# Altium PCB Eurocard VME 6U with break-away tab (9.187 x 8.660 inches).PCBDOC
Units mil, origin at the board's own origin, x right, y up, seen from the top; angles counter-clockwise.
Board outline 9937 x 8660 mil, 10 copper layers (TopLayer, MidLayer1, MidLayer2, MidLayer3, MidLayer4, MidLayer5, MidLayer6, MidLayer7, MidLayer8, BottomLayer); 2 components, 0 nets, 216 pads, 0 vias.
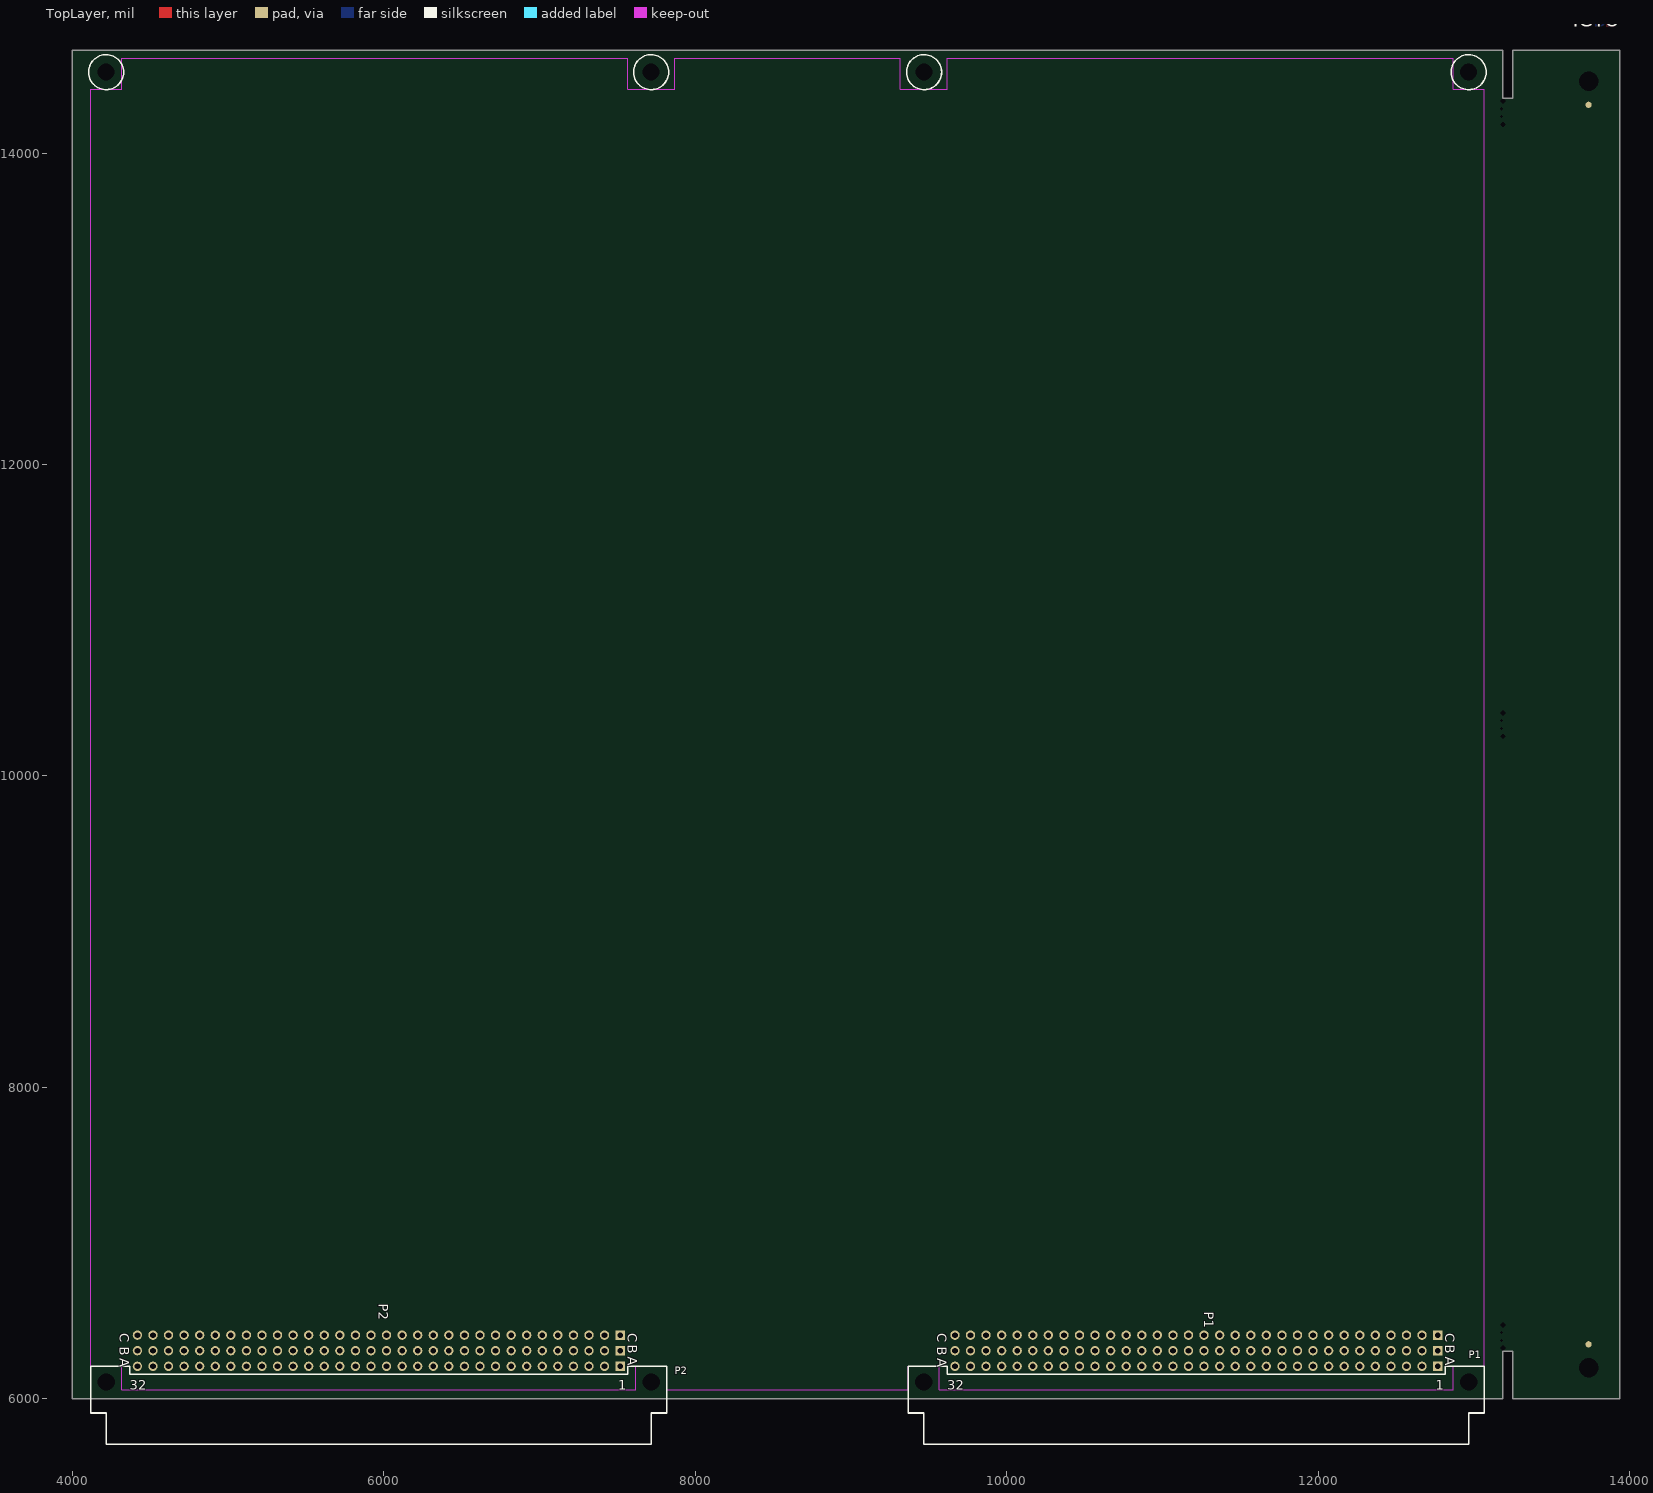
[diagram p0: TopLayer view]
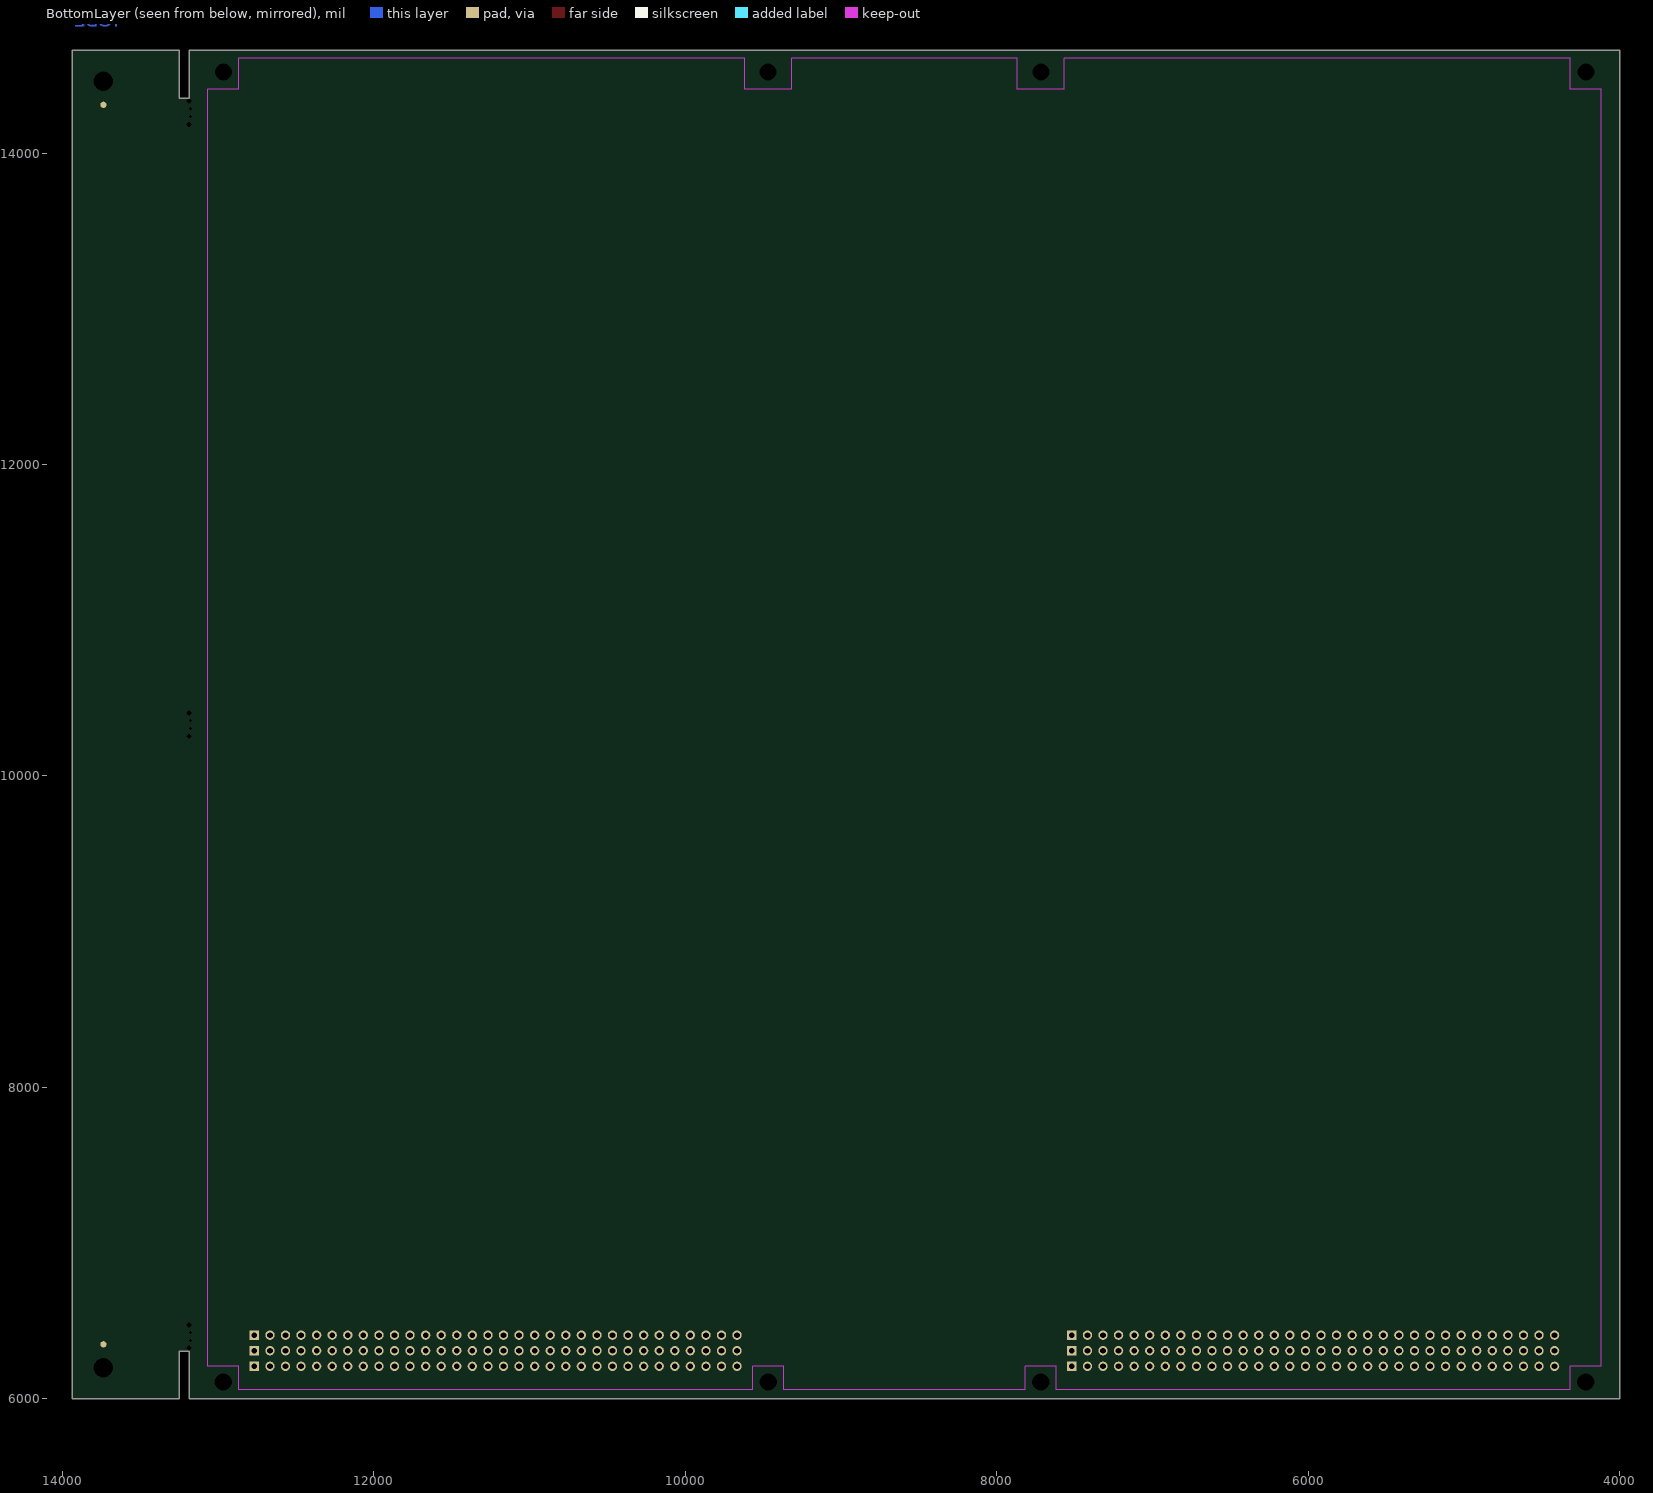
[diagram p1: BottomLayer view, seen from below]
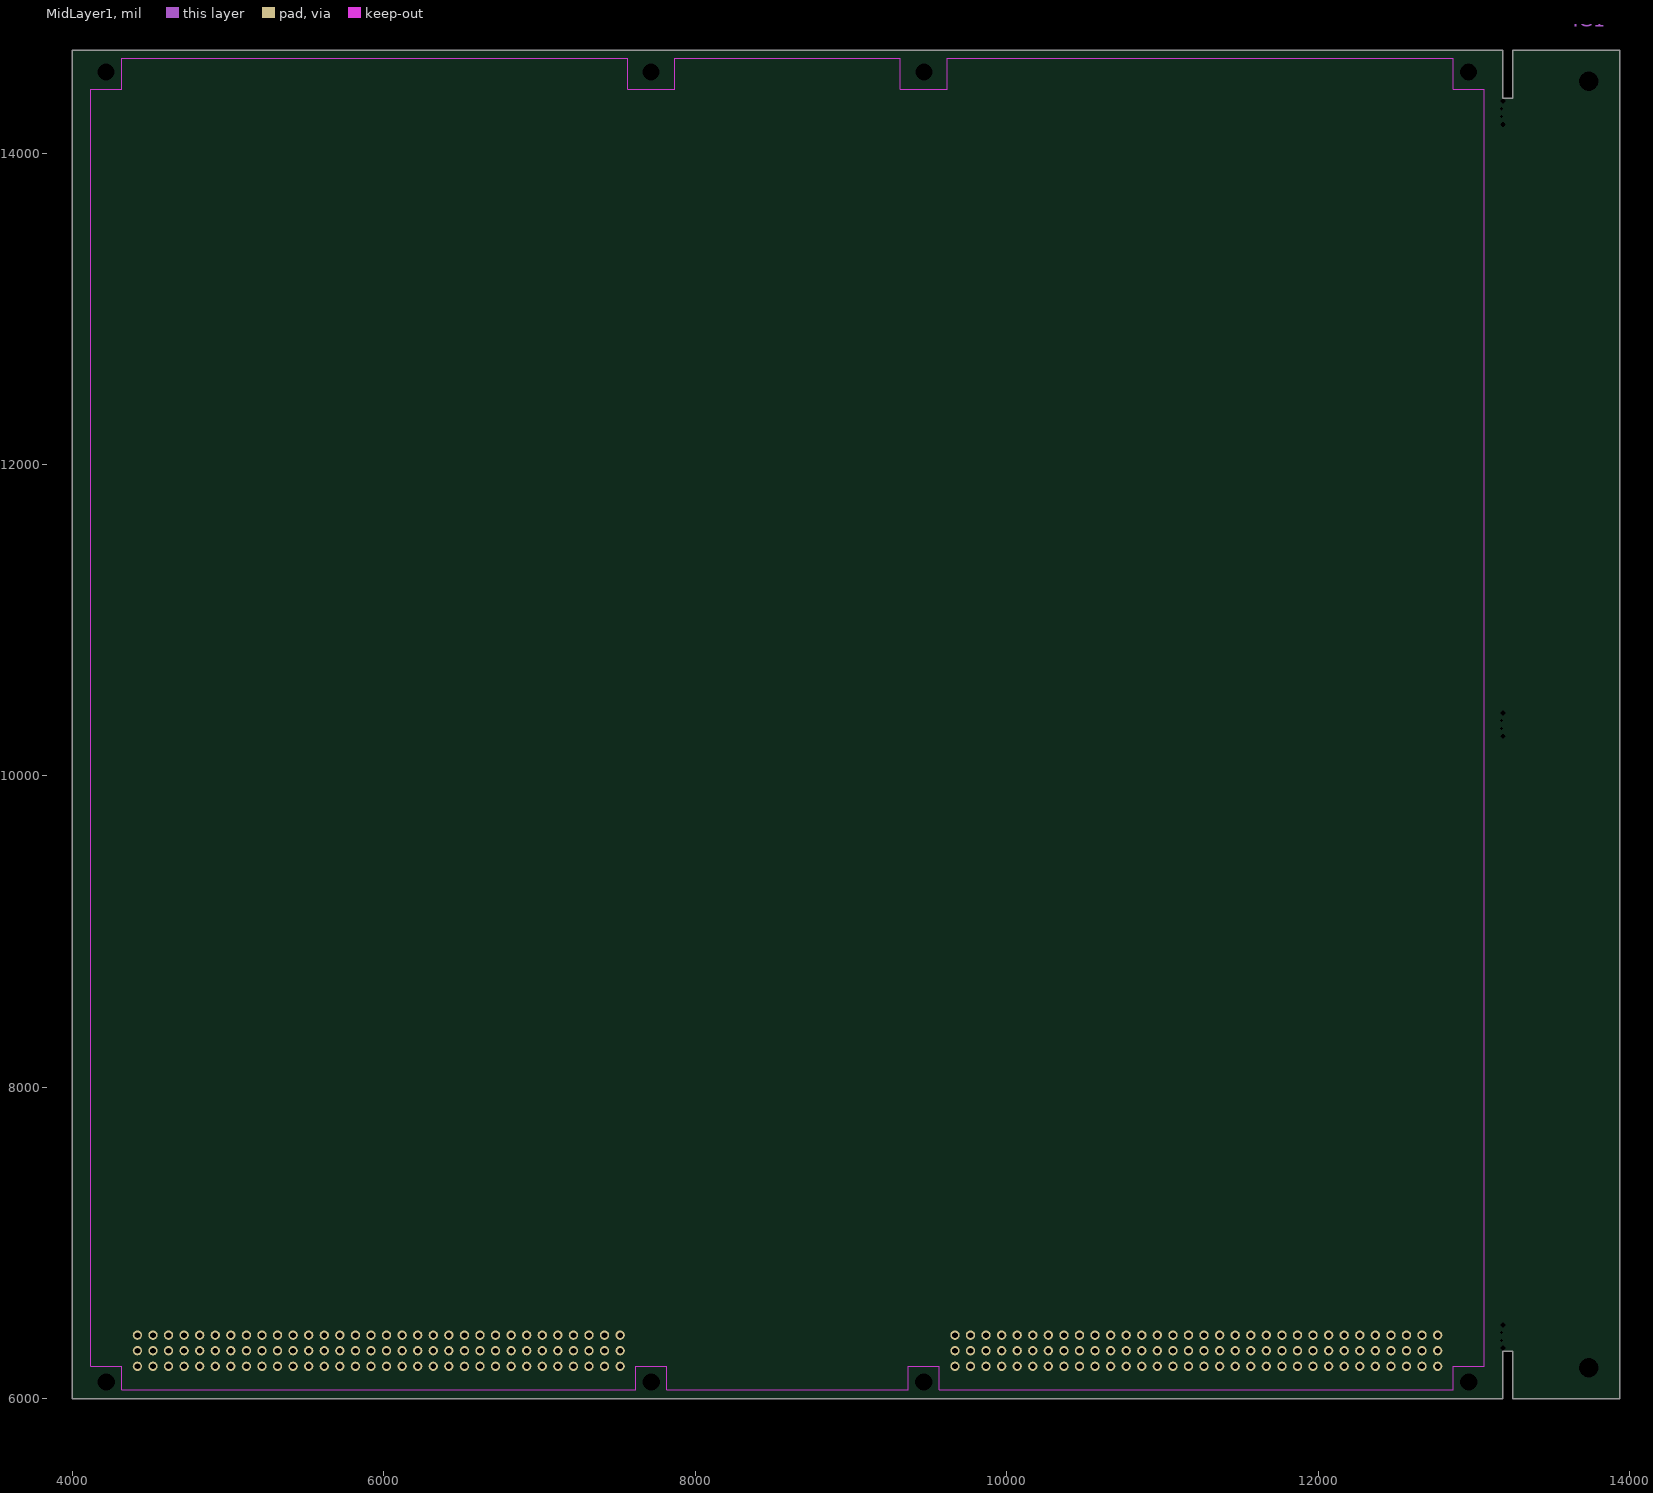
[diagram p2: MidLayer1]
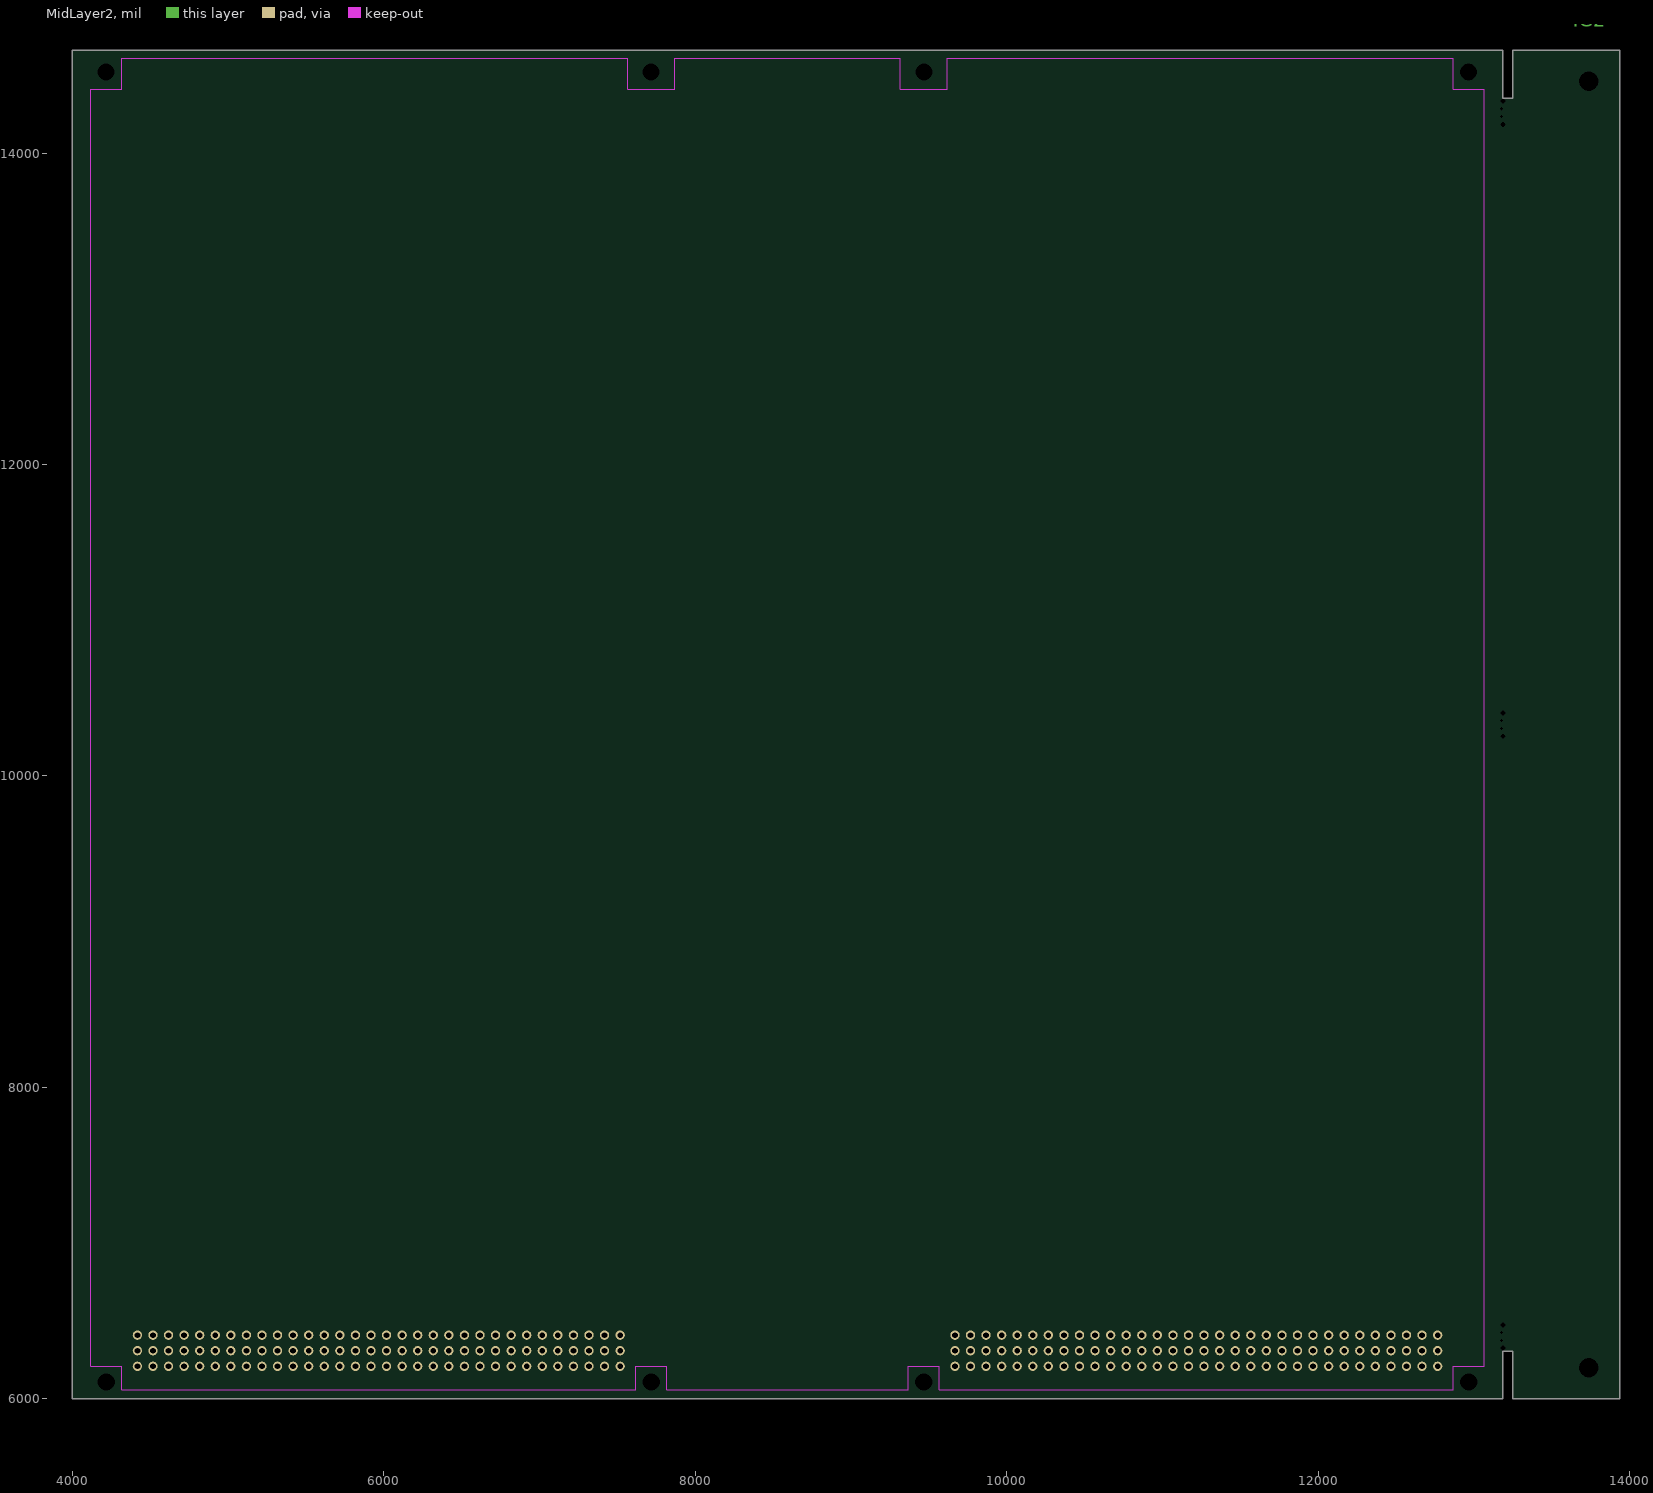
[diagram p3: MidLayer2]
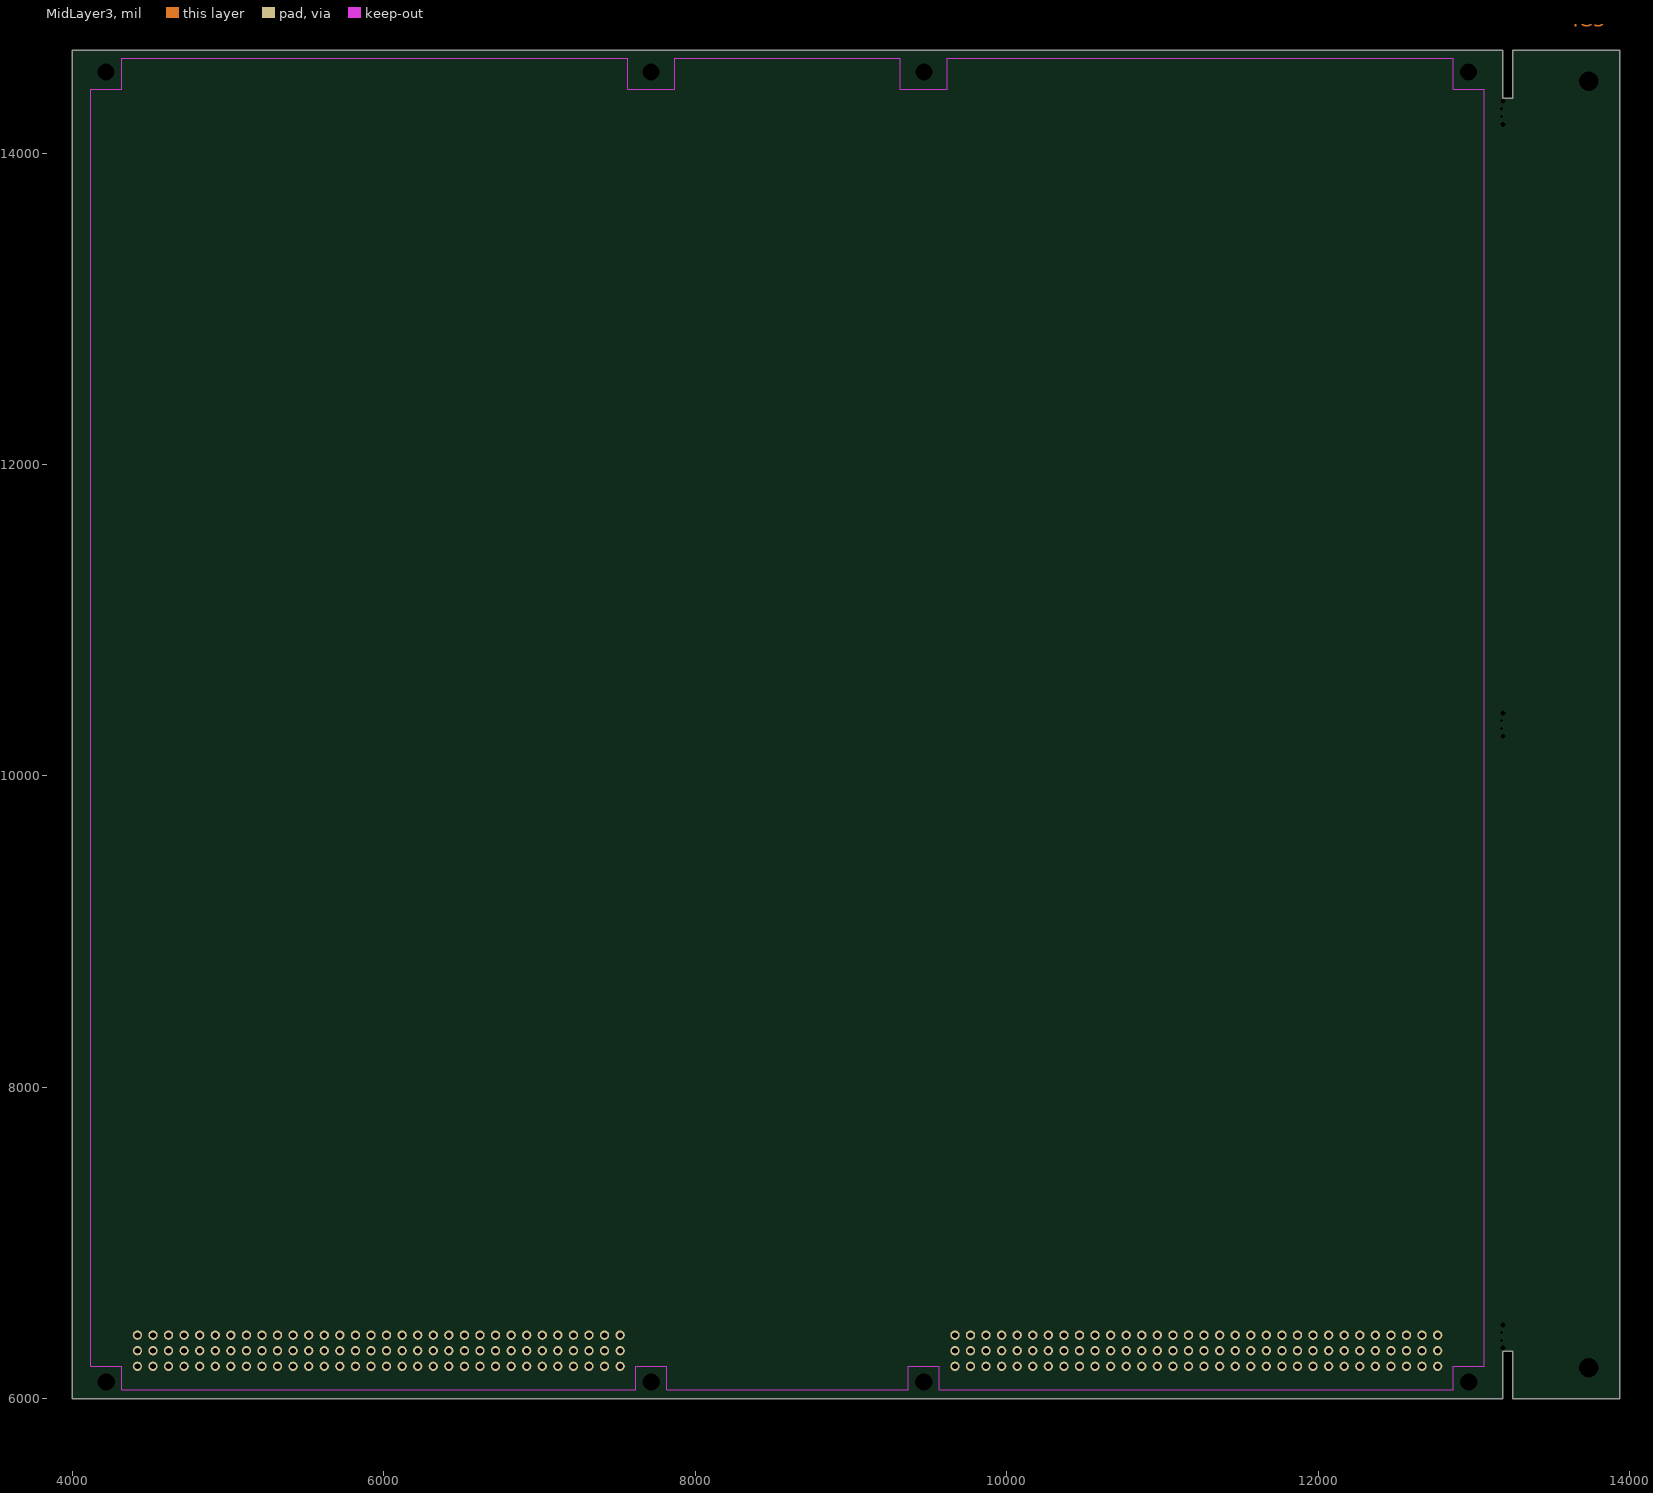
[diagram p4: MidLayer3]
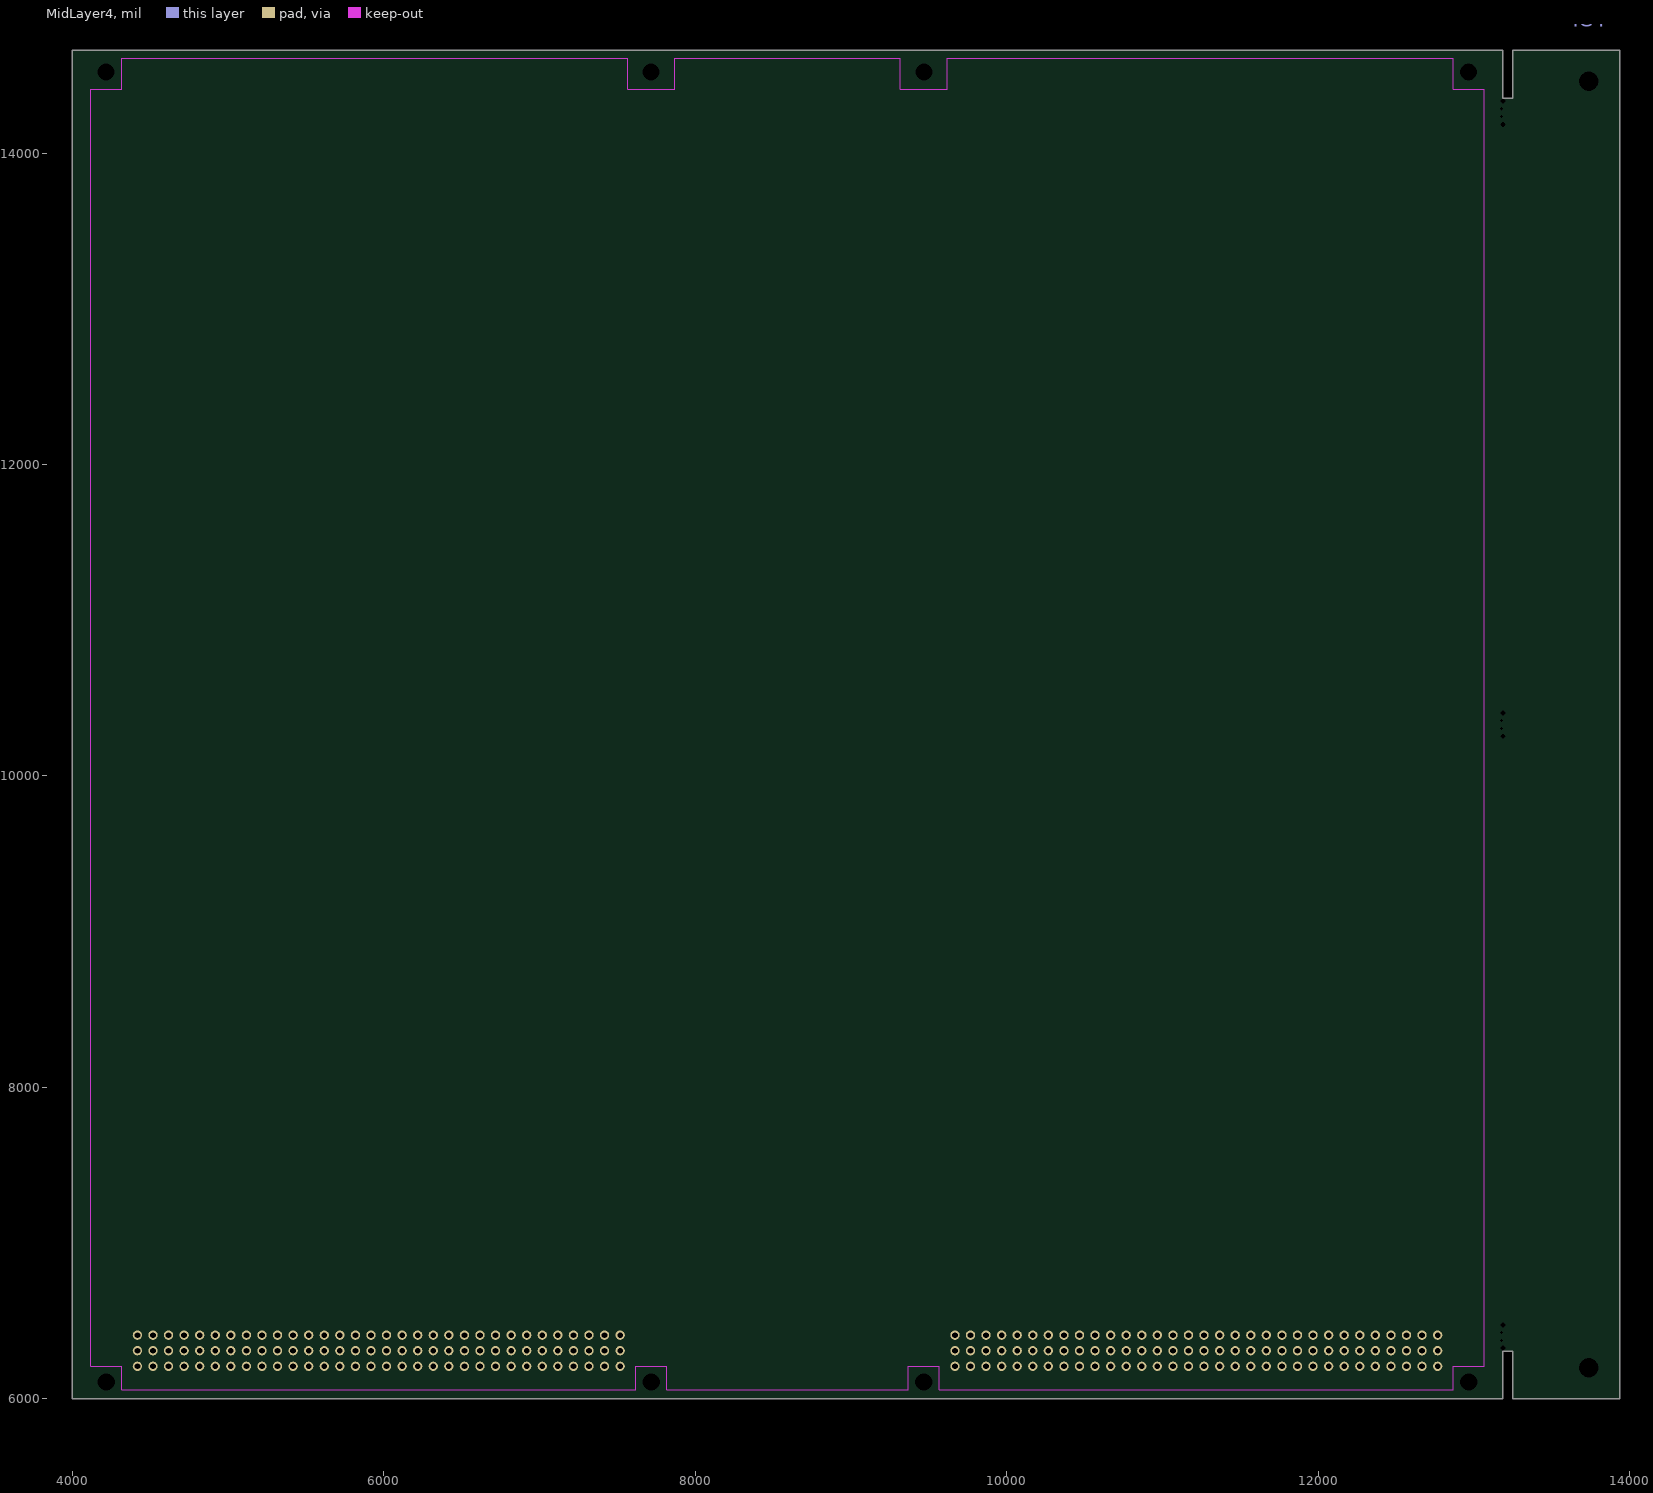
[diagram p5: MidLayer4]
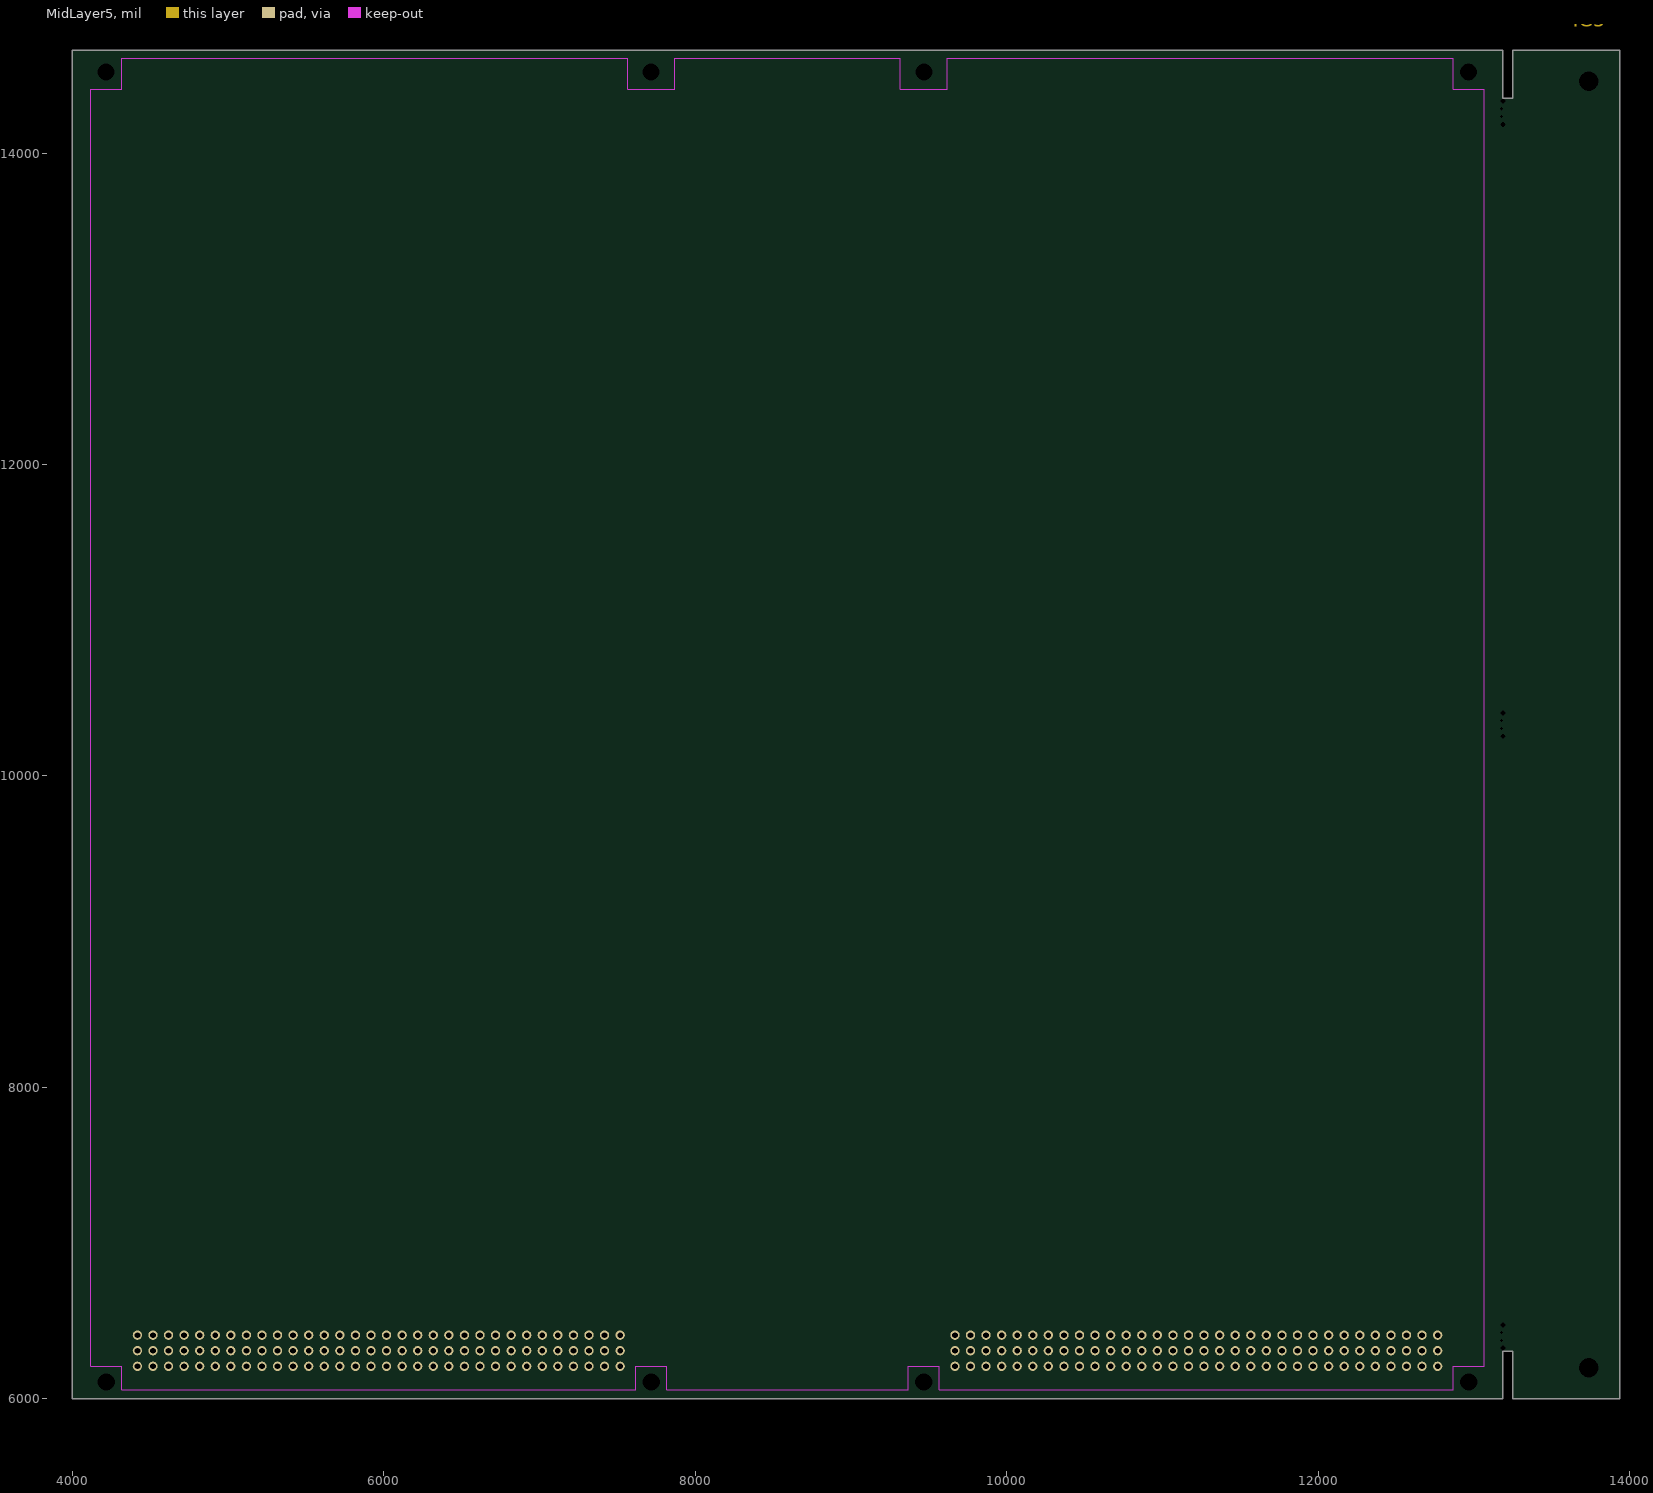
[diagram p6: MidLayer5]
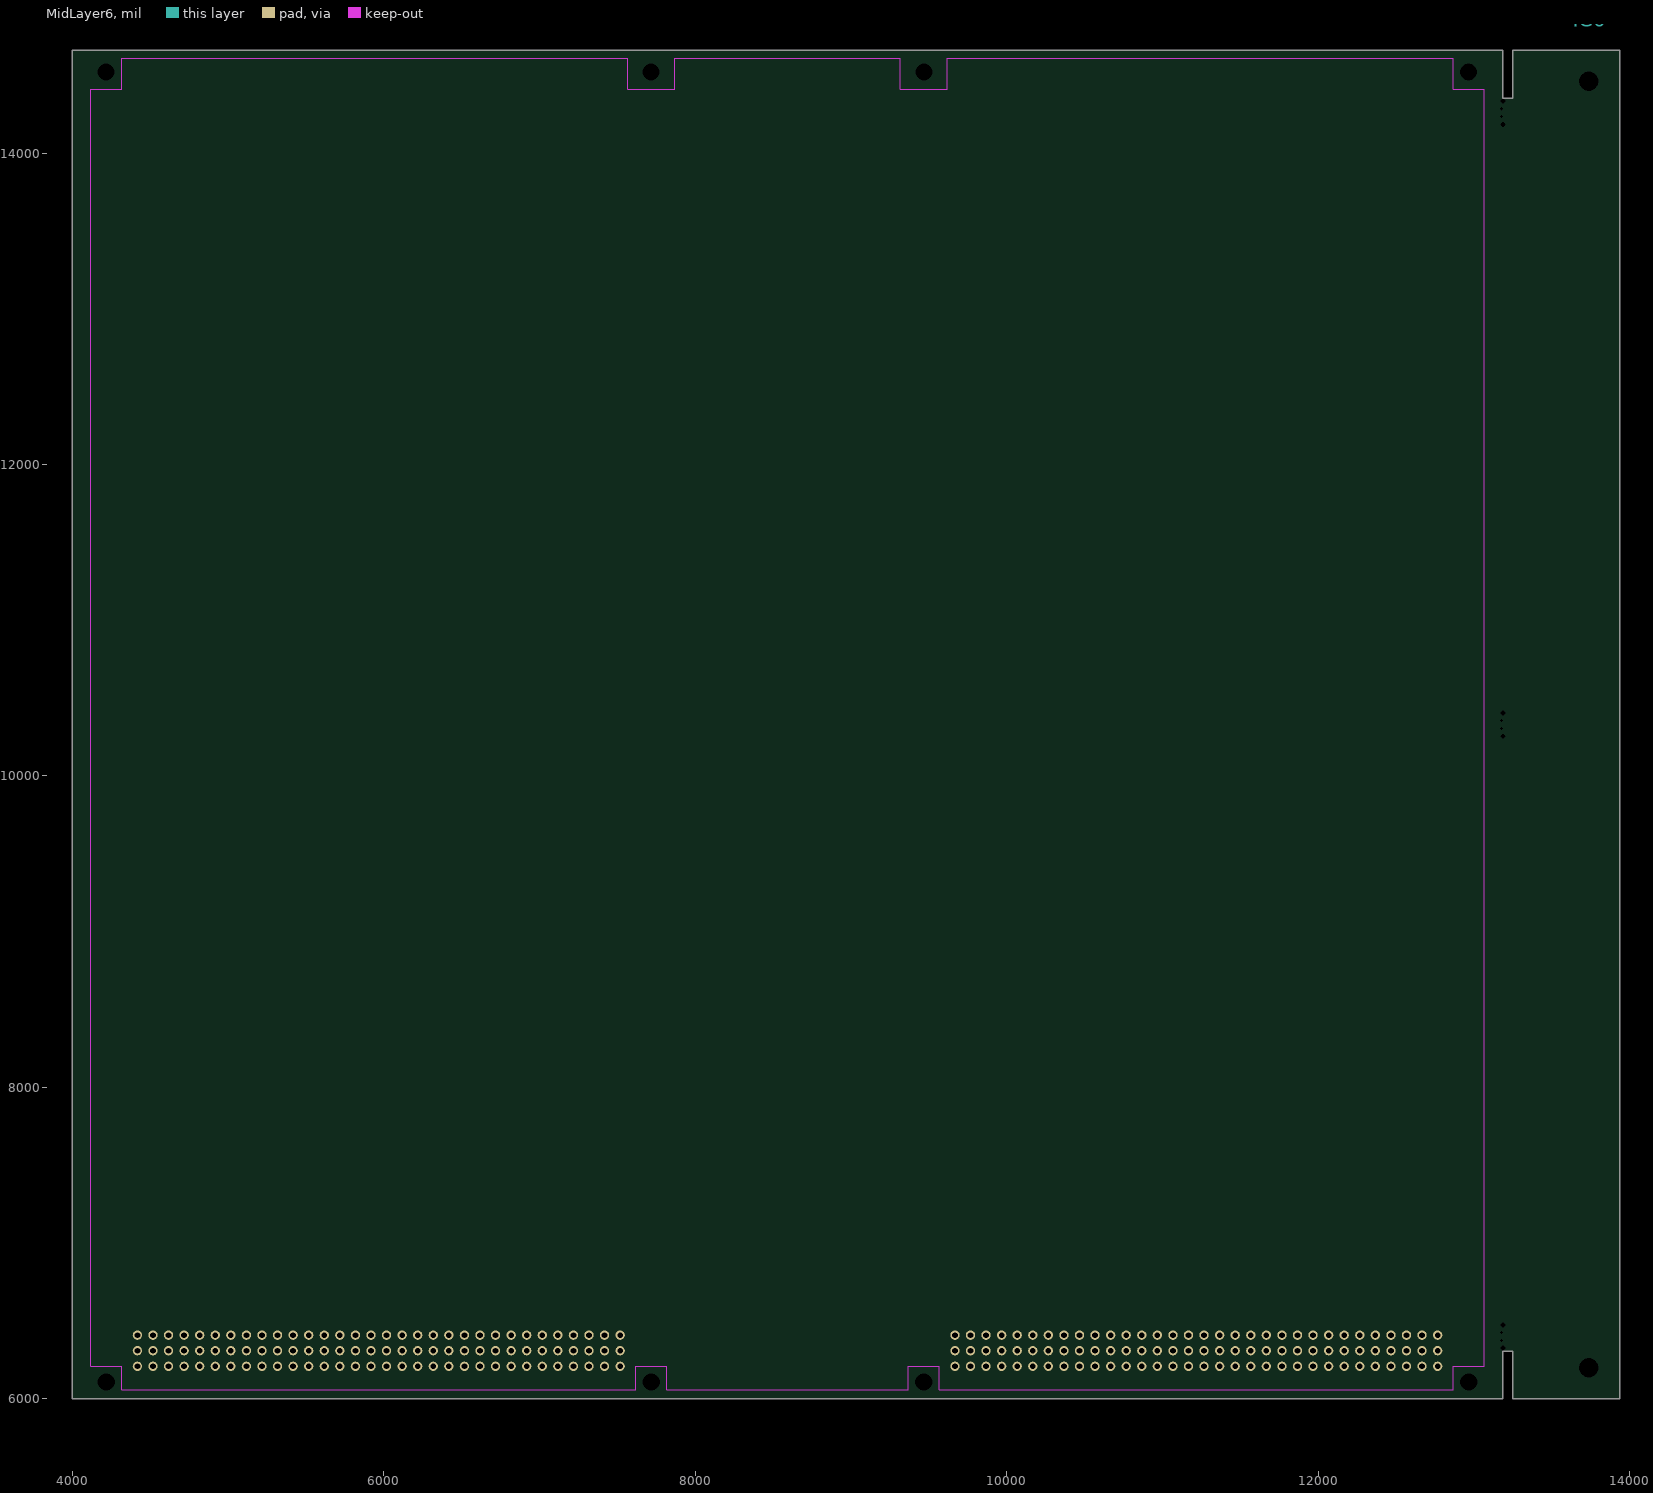
[diagram p7: MidLayer6]
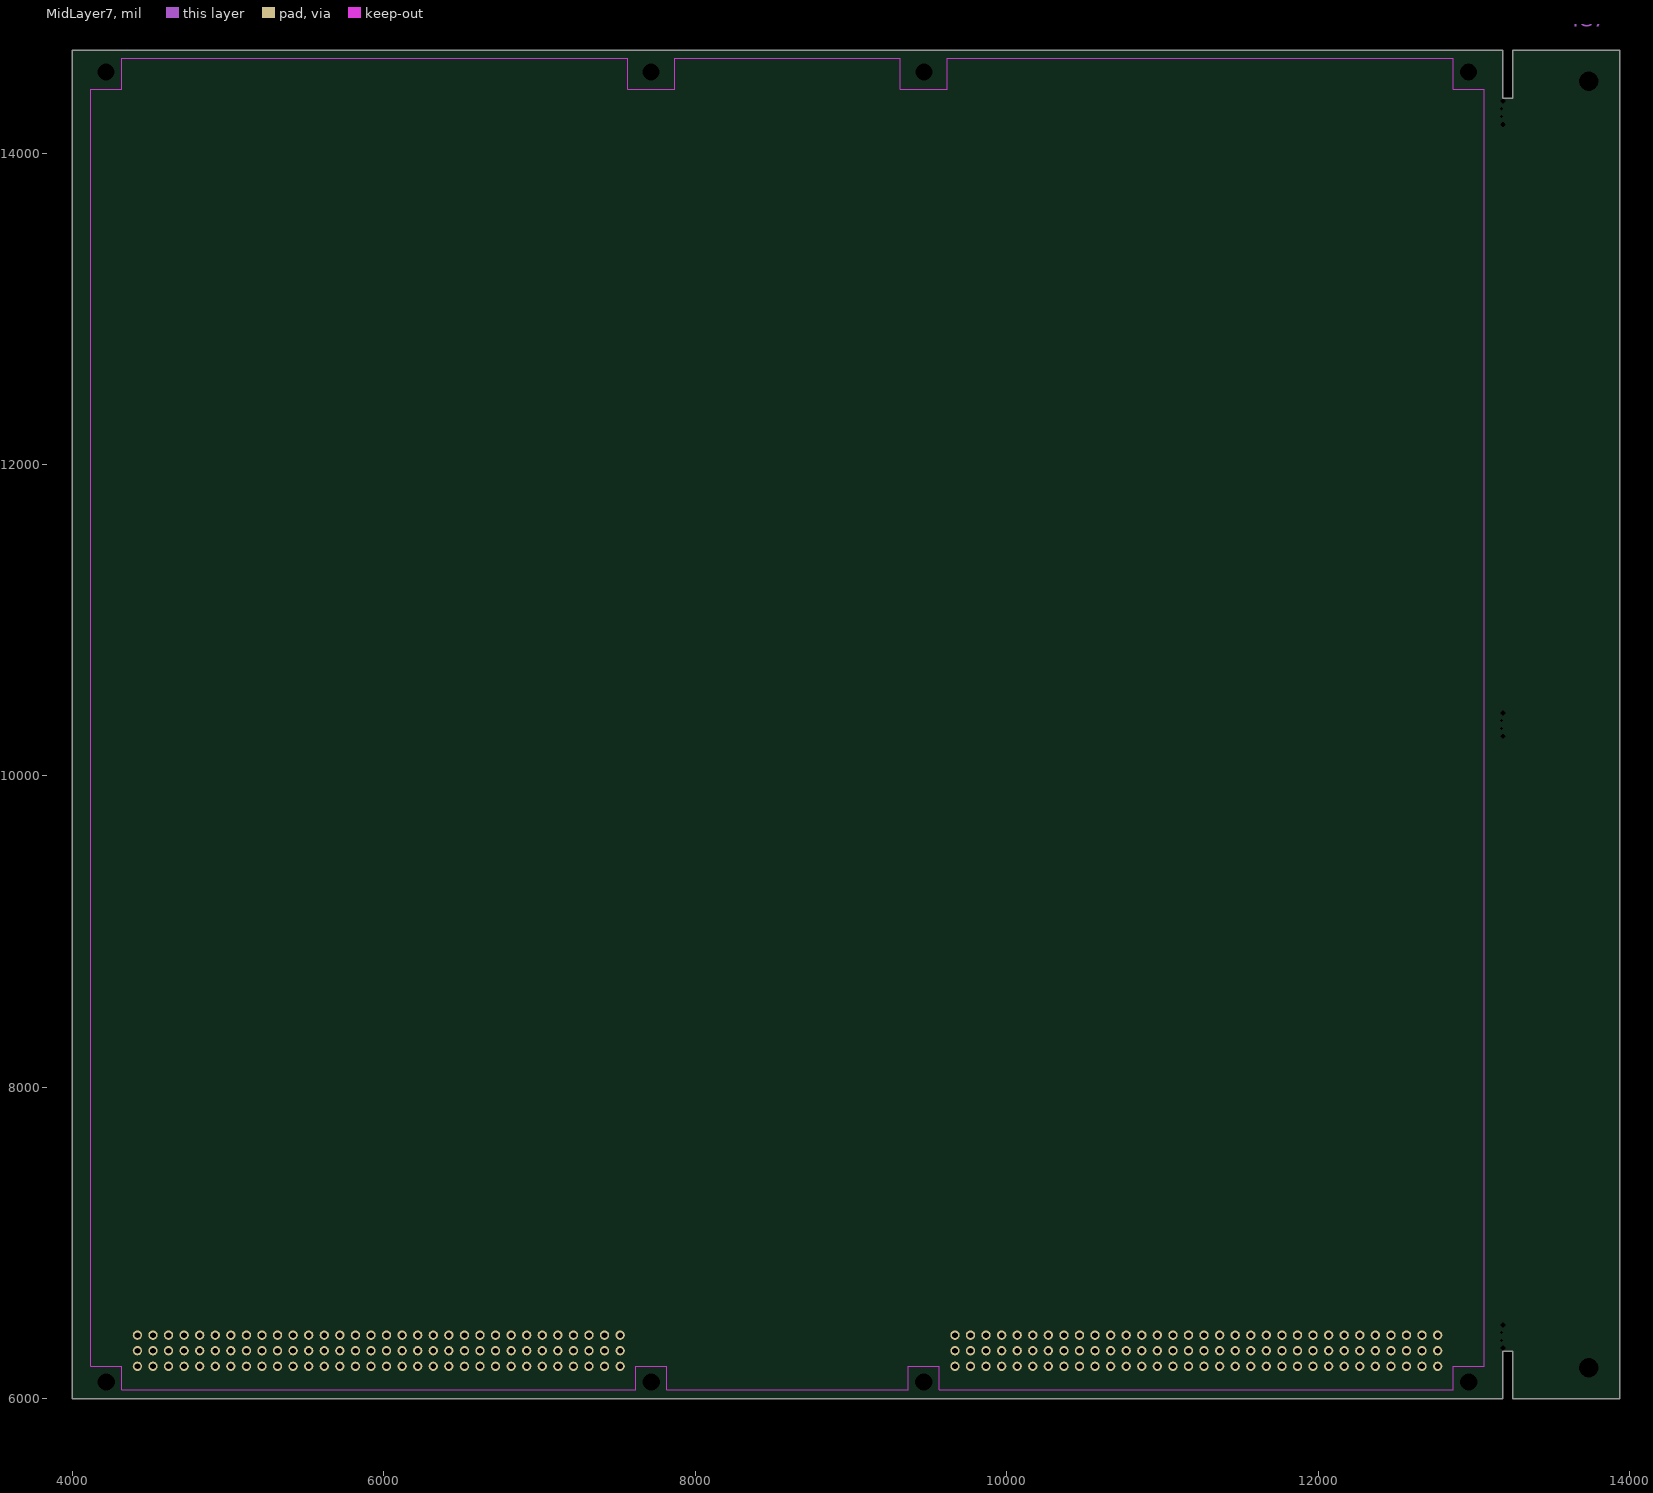
[diagram p8: MidLayer7]
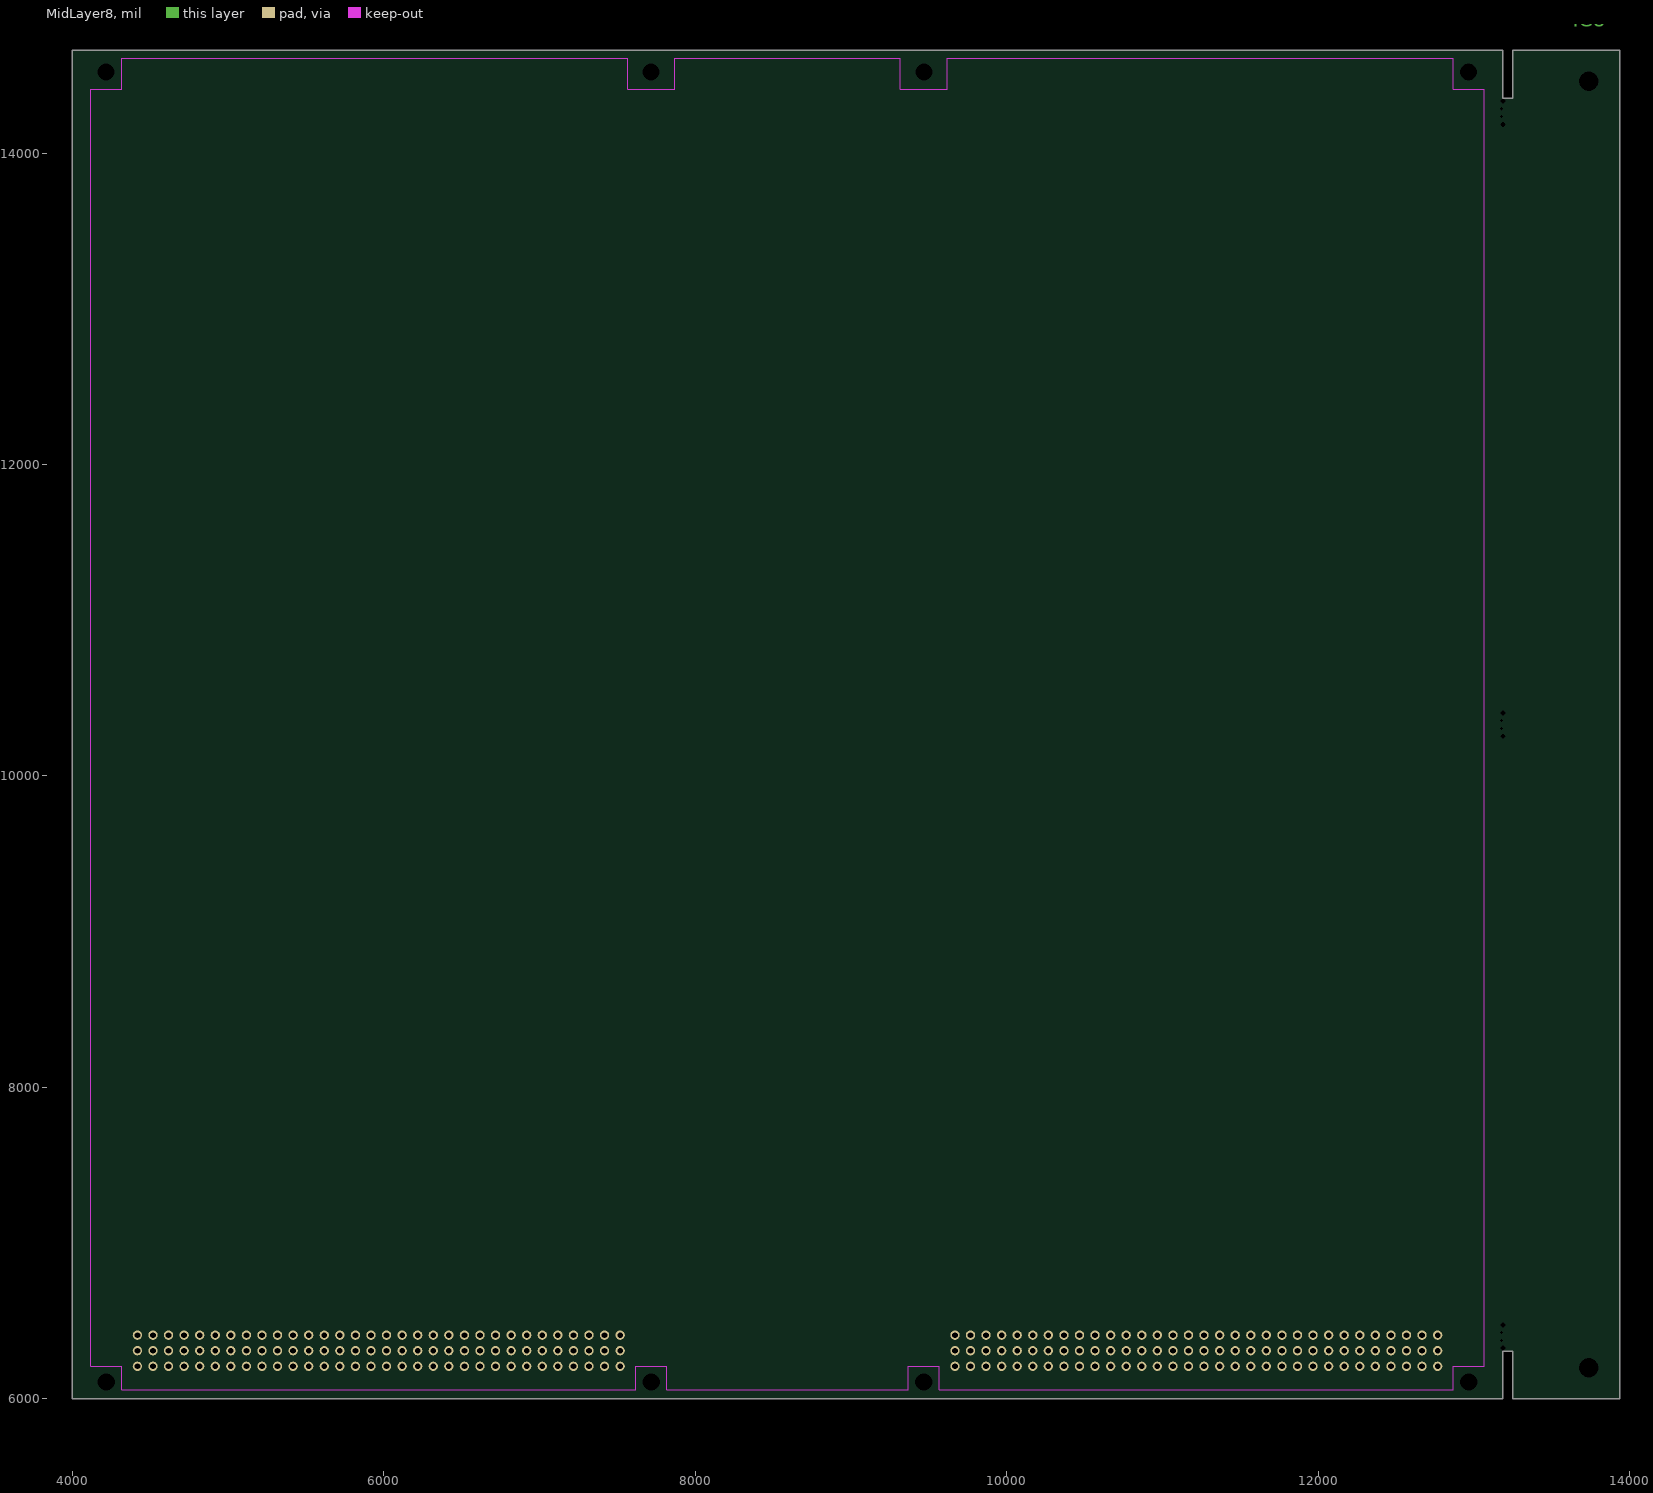
[diagram p9: MidLayer8]

## Layer stack, top to bottom
TopSolder: solder mask 0.4, Solder Resist, Dk 3.5
TopLayer: signal copper 1.4
Dielectric1: core 12.6, FR-4, Dk 4.8
MidLayer1: signal copper 1.4
Dielectric2: prepreg 12.6, FR-4, Dk 4.8
MidLayer2: signal copper 1.4
Dielectric3: core 12.6, FR-4, Dk 4.8
MidLayer3: signal copper 1.4
Dielectric4: prepreg 12.6, FR-4, Dk 4.8
MidLayer4: signal copper 1.4
Dielectric5: core 12.6, FR-4, Dk 4.8
MidLayer5: signal copper 1.4
Dielectric6: prepreg 12.6, FR-4, Dk 4.8
MidLayer6: signal copper 1.4
Dielectric7: core 12.6, FR-4, Dk 4.8
MidLayer7: signal copper 1.4
Dielectric8: prepreg 12.6, FR-4, Dk 4.8
MidLayer8: signal copper 1.4
Dielectric9: core 12.6, FR-4, Dk 4.8
BottomLayer: signal copper 1.4
BottomSolder: solder mask 0.4, Solder Resist, Dk 3.5

## Board outline
4000,6000 13187,6000 13187,6307 13249,6307 13249,6000 13937,6000 13937,14660 13249,14660 13249,14353 13187,14353 13187,14660 4000,14660

## Design rules (kind name [scope] priority, off if disabled: settings)
Clearance [All] p1: gap=10
FabricationTestPointUsage TestPointUsage [All] p1: valid=0 allowmultiple=FALSE
FabricationTestpoint Testpoint [All] p1: side=3 testpointundercomponent=TRUE minsize=40 maxsize=100 preferedsize=60 minholesize=20 maxholesize=40 preferedholesize=32 testpointgrid=1 allowsidetop=TRUE allowsidebottom=TRUE usegrid=TRUE gridtolerance=0.01
PlaneClearance [All] p1: clearance=10
PolygonConnect [All] p1: connectstyle=Relief reliefconductorwidth=10 reliefentries=4 polygonreliefangle="90 Angle" airgapwidth=10
RoutingVias [All] p1: holewidth=28 width=50 viastyle="Through Hole" minholewidth=28 minwidth=50 maxholewidth=28 maxwidth=50
SilkToSolderMaskClearance SilkscreenOverComponentPads [IsPad] p1: minsilkscreentomaskgap=10 clearancetoexposedcopper=TRUE
SolderMaskExpansion SolderMaskExpansion_1 [HasPad('Free-2')] p1: expansion=20
SolderMaskExpansion [HasPad('Free-1')] p2: expansion=20
SolderMaskExpansion SolderMaskExpansion_2 [All] p3: expansion=2
Width [All] p1: maxlimit=10 minlimit=10 preferedwidth=10
26 further rules are at their usual default settings.

## Components (designator, comment, footprint, x,y, rotation, side; value= is the part's Value field where it differs from the comment)
P1 "CNVME96" CNVME96 12768,6209 r0 top locked
P2 "CNVME96" CNVME96 7518,6209 r0 top locked

## Footprints (in the part's own frame and the unit in brackets; to place one, negate y for a bottom-side part, rotate by r counter-clockwise, add the part's x,y. Pads: shape width x height; smd on the part's side, far side on the other; paste and mask are expansions set on the pad)
CNVME96 [mil]
  round 50 hole 110: 97(200,-100) 98(-3300,-100)
  rect 60x60 / inner round 60 / far side rect 60x60 hole 37: A1(0,0) B1(0,100) C1(0,200)
  round 60 hole 37: A2(-100,0) A3(-200,0) A4(-300,0) A5(-400,0) A6(-500,0) A7(-600,0) A8(-700,0) A9(-800,0) A10(-900,0) A11(-1000,0) A12(-1100,0) A13(-1200,0) A14(-1300,0) A15(-1400,0) A16(-1500,0) A17(-1600,0) A18(-1700,0) A19(-1800,0) A20(-1900,0) A21(-2000,0) A22(-2100,0) A23(-2200,0) A24(-2300,0) A25(-2400,0) A26(-2500,0) A27(-2600,0) A28(-2700,0) A29(-2800,0) A30(-2900,0) A31(-3000,0) A32(-3100,0) B2(-100,100) B3(-200,100) B4(-300,100) B5(-400,100) B6(-500,100) B7(-600,100) B8(-700,100) B9(-800,100) B10(-900,100) B11(-1000,100) B12(-1100,100) B13(-1200,100) B14(-1300,100) B15(-1400,100) B16(-1500,100) B17(-1600,100) B18(-1700,100) B19(-1800,100) B20(-1900,100) B21(-2000,100) B22(-2100,100) B23(-2200,100) B24(-2300,100) B25(-2400,100) B26(-2500,100) B27(-2600,100) B28(-2700,100) B29(-2800,100) B30(-2900,100) B31(-3000,100) B32(-3100,100) C2(-100,200) C3(-200,200) C4(-300,200) C5(-400,200) C6(-500,200) C7(-600,200) C8(-700,200) C9(-800,200) C10(-900,200) C11(-1000,200) C12(-1100,200) C13(-1200,200) C14(-1300,200) C15(-1400,200) C16(-1500,200) C17(-1600,200) C18(-1700,200) C19(-1800,200) C20(-1900,200) C21(-2000,200) C22(-2100,200) C23(-2200,200) C24(-2300,200) C25(-2400,200) C26(-2500,200) C27(-2600,200) C28(-2700,200) C29(-2800,200) C30(-2900,200) C31(-3000,200) C32(-3100,200)
  silkscreen extent -3400,-500 300,0

## Free pads (board coordinates)
  round 40 / inner round 0 / far side round 40 all layers, no hole: 1(13737,14310) 2(13737,6350)
  round 0 hole 32: 3(13187,14335) 6(13187,14185) 7(13187,10405) 10(13187,10255) 11(13187,6475) 14(13187,6325)
  round 0 hole 20: 4(13177,14285) 5(13177,14235) 8(13177,10355) 9(13177,10305) 12(13177,6425) 13(13177,6375)
  round 50 hole 125: 15(13737,14460) 16(13737,6200)
  round 50 hole 110: 17(12967,14520) 18(9470,14520) 19(7717,14520) 20(4217,14520)

## Nets (pads, with @x,y where several pads share a name; then routed paths per layer and width w, separated by ;. In a path a pad name is that pad's centre, name@x,y a point inside that pad or via, vN(x,y) a via of type N, cw(c..) or ccw(c..) an arc to the next point about the centre after c; other vN are vias at no path point)
pads on no net: P1.97 P1.98 P1.A1 P1.A2 P1.A3 P1.A4 P1.A5 P1.A6 P1.A7 P1.A8 P1.A9 P1.A10 P1.A11 P1.A12 P1.A13 P1.A14 P1.A15 P1.A16 P1.A17 P1.A18 P1.A19 P1.A20 P1.A21 P1.A22 P1.A23 P1.A24 P1.A25 P1.A26 P1.A27 P1.A28 P1.A29 P1.A30 P1.A31 P1.A32 P1.B1 P1.B2 P1.B3 P1.B4 P1.B5 P1.B6 P1.B7 P1.B8 P1.B9 P1.B10 P1.B11 P1.B12 P1.B13 P1.B14 P1.B15 P1.B16 P1.B17 P1.B18 P1.B19 P1.B20 P1.B21 P1.B22 P1.B23 P1.B24 P1.B25 P1.B26 P1.B27 P1.B28 P1.B29 P1.B30 P1.B31 P1.B32 P1.C1 P1.C2 P1.C3 P1.C4 P1.C5 P1.C6 P1.C7 P1.C8 P1.C9 P1.C10 P1.C11 P1.C12 P1.C13 P1.C14 P1.C15 P1.C16 P1.C17 P1.C18 P1.C19 P1.C20 P1.C21 P1.C22 P1.C23 P1.C24 P1.C25 P1.C26 P1.C27 P1.C28 P1.C29 P1.C30 P1.C31 P1.C32 P2.97 P2.98 P2.A1 P2.A2 P2.A3 P2.A4 P2.A5 P2.A6 P2.A7 P2.A8 P2.A9 P2.A10 P2.A11 P2.A12 P2.A13 P2.A14 P2.A15 P2.A16 P2.A17 P2.A18 P2.A19 P2.A20 P2.A21 P2.A22 P2.A23 P2.A24 P2.A25 P2.A26 P2.A27 P2.A28 P2.A29 P2.A30 P2.A31 P2.A32 P2.B1 P2.B2 P2.B3 P2.B4 P2.B5 P2.B6 P2.B7 P2.B8 P2.B9 P2.B10 P2.B11 P2.B12 P2.B13 P2.B14 P2.B15 P2.B16 P2.B17 P2.B18 P2.B19 P2.B20 P2.B21 P2.B22 P2.B23 P2.B24 P2.B25 P2.B26 P2.B27 P2.B28 P2.B29 P2.B30 P2.B31 P2.B32 P2.C1 P2.C2 P2.C3 P2.C4 P2.C5 P2.C6 P2.C7 P2.C8 P2.C9 P2.C10 P2.C11 P2.C12 P2.C13 P2.C14 P2.C15 P2.C16 P2.C17 P2.C18 P2.C19 P2.C20 P2.C21 P2.C22 P2.C23 P2.C24 P2.C25 P2.C26 P2.C27 P2.C28 P2.C29 P2.C30 P2.C31 P2.C32

## Keep-outs
KeepOutLayer:
  lines w8: 4118,6209 4318,6209 4318,6059 7618,6059 7618,6209 7818,6209 7818,6059 9368,6059 9368,6209 9568,6209 9568,6059 12868,6059 12868,6209 13068,6209 13068,14409 12868,14409 12868,14609 9618,14609 9618,14409 9318,14409 9318,14609 7868,14609 7868,14409 7568,14409 7568,14609 4318,14609 4318,14409 4118,14409 4118,6209

## Other copper
TopLayer:
  text ".GTL" at 13637,14810 h90
MidLayer1:
  text ".G1" at 13637,14810 h90
MidLayer2:
  text ".G2" at 13637,14810 h90
MidLayer3:
  text ".G3" at 13637,14810 h90
MidLayer4:
  text ".G4" at 13637,14810 h90
MidLayer5:
  text ".G5" at 13637,14810 h90
MidLayer6:
  text ".G6" at 13637,14810 h90
MidLayer7:
  text ".G7" at 13637,14810 h90
MidLayer8:
  text ".G8" at 13637,14810 h90
BottomLayer:
  text "P/N XXXXXX-XXX REV A" at 5320,14860 h75
  text ".GBL" at 13637,14810 h90

## Silkscreen, mask and mechanical layers (free items; w line width, h text height)
TopOverlay:
  circle w10: c4217,14520 r112.5
  circle w10: c7717,14520 r112.5
  circle w10: c9470,14520 r112.5
  circle w10: c12967,14520 r112.5
  rectangle: 4281,15063 5031,15263
  rectangle: 4281,15353 5031,15553
  lines w10: 5392.59,15455.97 ccw(c5441,15495.5) 5392.71,15455.83
  text "C" at 5496,15458 h60
  text "2002 COMPANY NAME" at 5646,15458 h75
  text "S/N" at 4031,15410.5 h75
  text "BOARD NAME" at 5496,15283 h75
  text "ASSY NO.: XXXXXX" at 5496,15133 h75
  text "REV" at 4031,15113 h75
  text ".GTO" at 13637,14810 h90
  text "P2" at 5968,6609 h60 r270
  text "P1" at 11268,6559 h60 r270
TopPaste:
  text ".GTP" at 13637,14810 h90
BottomPaste:
  text ".GBP" at 13637,14810 h90
TopSolder:
  text ".GTS" at 13637,14810 h90
BottomSolder:
  text ".GBS" at 13637,14810 h90
Mechanical1:
  lines w20: 4000,6000 13187,6000 13187,6307 13249,6307 13249,6000 13937,6000 13937,14660 13249,14660 13249,14353 13187,14353 13187,14660 4000,14660 4000,6000 ; 13187,6493 13249,6493 13249,10237 13187,10237 13187,6493 ; 13187,10423 13249,10423 13249,14167 13187,14167 13187,10423
Mechanical4:
  text ".Pcb_File_Name_No_Path" at 11737,15000 h90
  text ".Printout_Name" at 11737,14810 h90
DrillDrawing:
  text ".LEGEND" at 14918,6159 h90
  text "Drilling Details." at 14918,6009 h90

## Dimensions
3980,6109 to 4000,6000 on Mechanical4
4217,5981 to 4000,6000 on Mechanical4

## Text inside footprints (layer, text, board x,y; h text height)
P1: TopOverlay "C" at 12818,6421.5 h60 r270; TopOverlay "B" at 12818,6346.5 h60 r270; TopOverlay "A" at 12818,6271.5 h60 r270; TopOverlay "C" at 9555.5,6421.5 h60 r270; TopOverlay "B" at 9555.5,6334 h60 r270; TopOverlay "A" at 9555.5,6259 h60 r270; TopOverlay "32" at 9618,6059 h60; TopOverlay "1" at 12755.5,6059 h60
P2: TopOverlay "C" at 7568,6421.5 h60 r270; TopOverlay "B" at 7568,6346.5 h60 r270; TopOverlay "A" at 7568,6271.5 h60 r270; TopOverlay "C" at 4305.5,6421.5 h60 r270; TopOverlay "B" at 4305.5,6334 h60 r270; TopOverlay "A" at 4305.5,6259 h60 r270; TopOverlay "32" at 4368,6059 h60; TopOverlay "1" at 7505.5,6059 h60